# EAGLE board ultrasound (EAGLE 8.5.2)
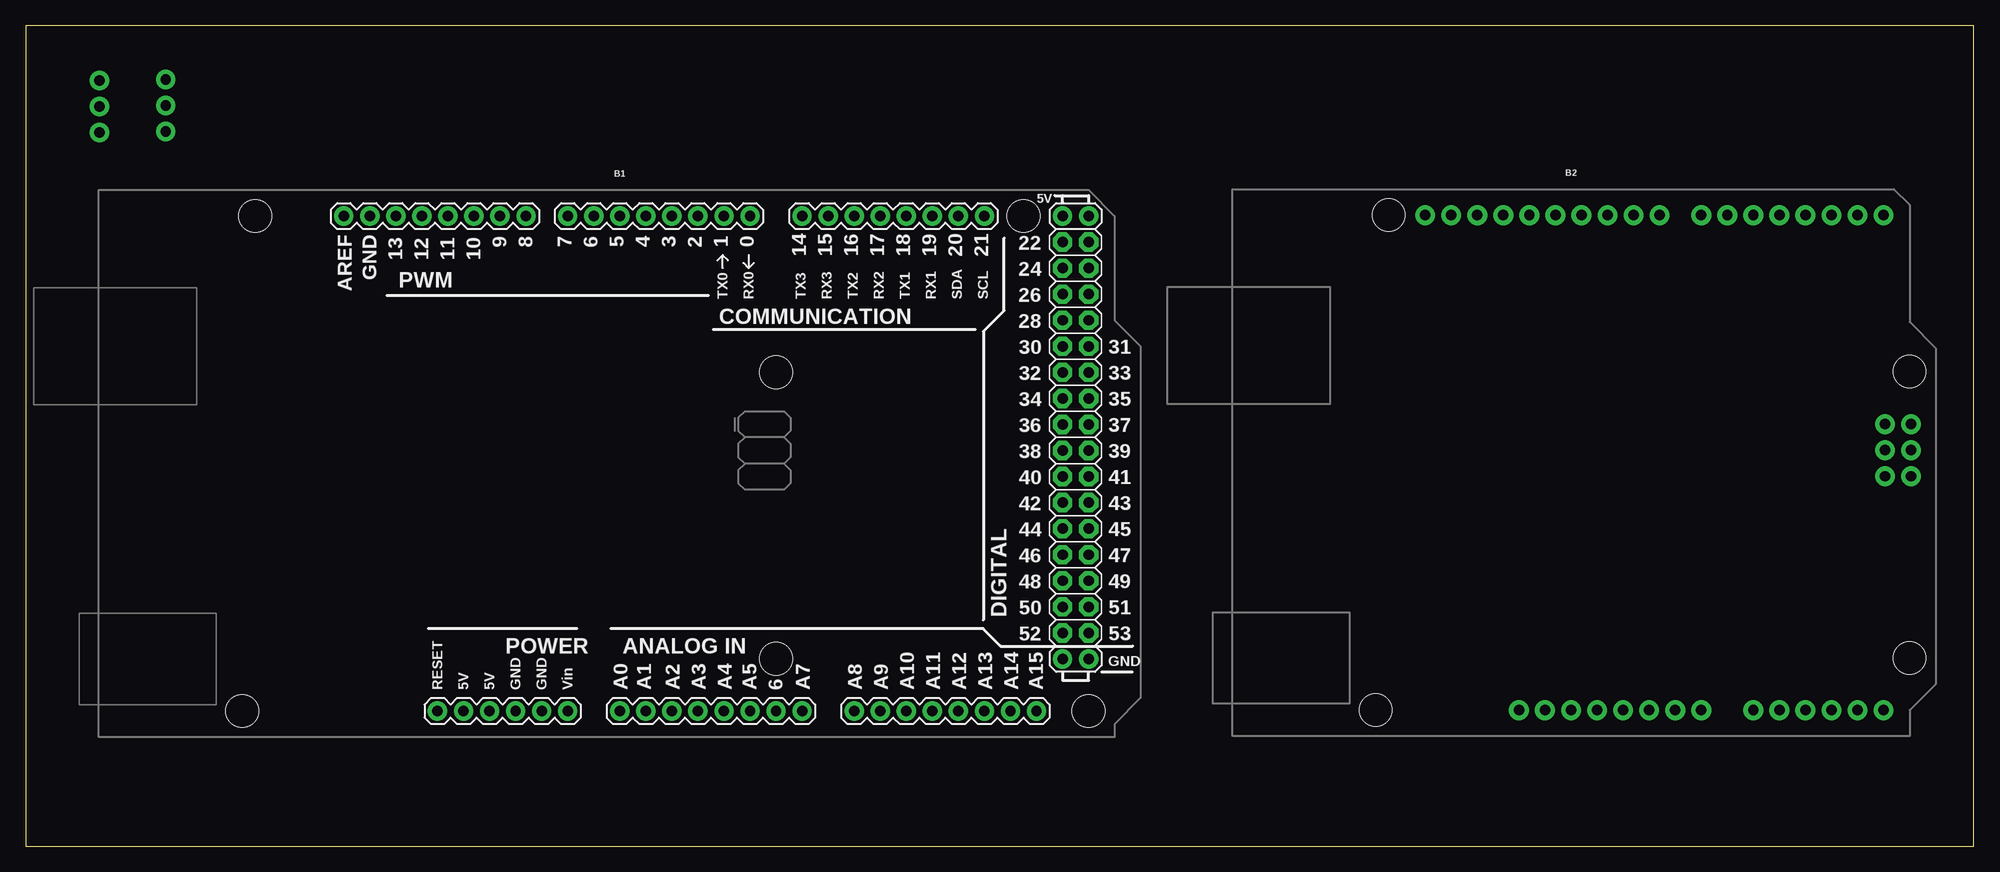
[diagram p0: board, top side]
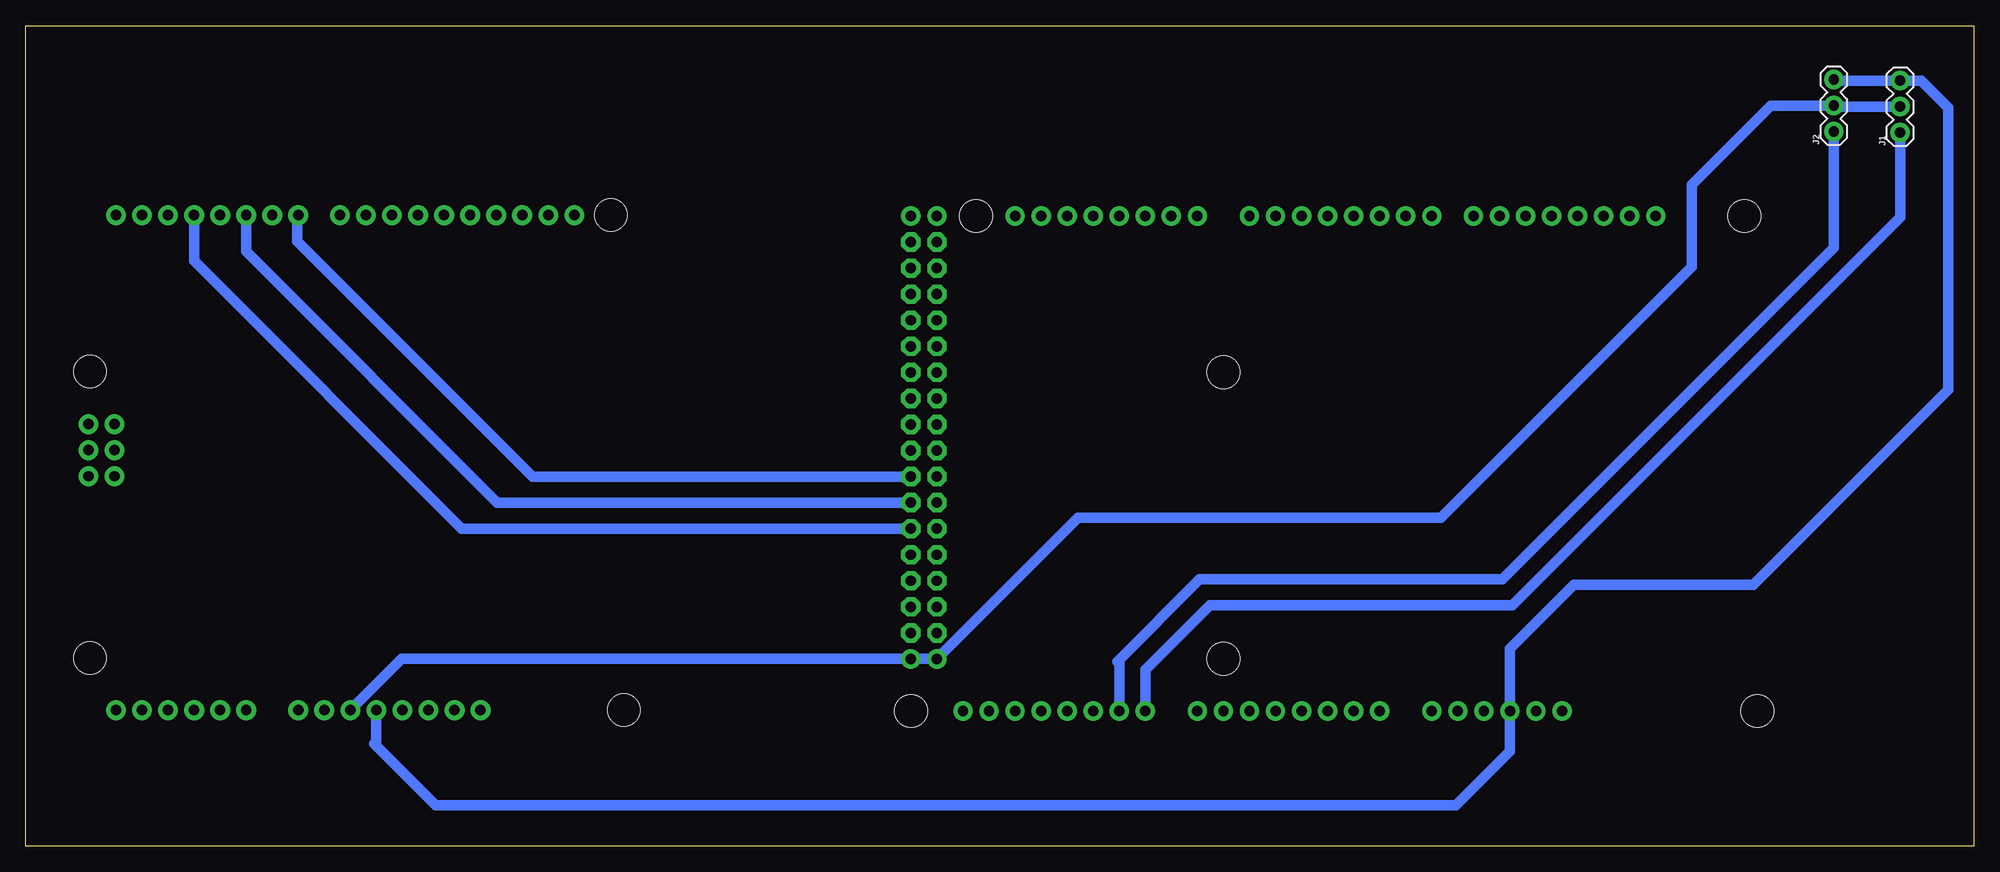
[diagram p1: board, bottom side, seen from below]

Size 190 x 80 mm. Coordinates in mm from the lower left corner, seen from the top.
Outline: 0,80 0,0 190,0 190,80 0,80
Copper layers (1*16): Top 0.035mm / dielectric 1.5mm / Bottom 0.035mm
Design rules "default": minimum track width 6mil, minimum drill 0.35mm, track to track 6mil, track to pad 6mil, pad to pad 6mil, via to via 6mil, smd to smd 6mil, copper to edge 40mil, drill to drill 6mil, minimum pad ring 10mil, minimum via ring 8mil, stop-mask expansion 4mil, vias tented up to drill 0mil, thermal gap 10mil

## Footprints (pad centres in the part's own frame; a part is rotated, then mirrored left to right if it is on the bottom)
ARDUINO_MEGA = drill 1.016 pad 1.88: 0 13.97,24.13; 1 11.43,24.13; 2 8.89,24.13; 3 6.35,24.13; 3.3V -13.97,-24.13; 4 3.81,24.13; 5 1.27,24.13; 5V@0 -11.43,-24.13; 5V@1 44.45,24.13; 5V@2 46.99,24.13; 6 -1.27,24.13; 7 -3.81,24.13; 8 -7.874,24.13; 9 -10.414,24.13; 10 -12.954,24.13; 11 -15.494,24.13; 12 -18.034,24.13; 13 -20.574,24.13; 14 19.05,24.13; 15 21.59,24.13; 16 24.13,24.13; 17 26.67,24.13; 18 29.21,24.13; 19 31.75,24.13; 20 34.29,24.13; 21 36.83,24.13; A0 1.27,-24.13; A1 3.81,-24.13; A2 6.35,-24.13; A3 8.89,-24.13; A4 11.43,-24.13; A5 13.97,-24.13; A6 16.51,-24.13; A7 19.05,-24.13; A8 24.13,-24.13; A9 26.67,-24.13; A10 29.21,-24.13; A11 31.75,-24.13; A12 34.29,-24.13; A13 36.83,-24.13; A14 39.37,-24.13; A15 41.91,-24.13; AREF -25.654,24.13; GND@0 -8.89,-24.13; GND@1 -6.35,-24.13; GND@2 44.45,-19.05; GND@3 46.99,-19.05; GND@4 -23.114,24.13; RESET -16.51,-24.13; VIN -3.81,-24.13 | drill 1.016 pad 1.88 octagon: 22 44.45,21.59; 23 46.99,21.59; 24 44.45,19.05; 25 46.99,19.05; 26 44.45,16.51; 27 46.99,16.51; 28 44.45,13.97; 29 46.99,13.97; 30 44.45,11.43; 31 46.99,11.43; 32 44.45,8.89; 33 46.99,8.89; 34 44.45,6.35; 35 46.99,6.35; 36 44.45,3.81; 37 46.99,3.81; 38 44.45,1.27; 39 46.99,1.27; 40 44.45,-1.27; 41 46.99,-1.27; 42 44.45,-3.81; 43 46.99,-3.81; 44 44.45,-6.35; 45 46.99,-6.35; 46 44.45,-8.89; 47 46.99,-8.89; 48 44.45,-11.43; 49 46.99,-11.43; 50 44.45,-13.97; 51 46.99,-13.97; 52 44.45,-16.51; 53 46.99,-16.51 | hole 3.2: -34.29,24.13; -35.56,-24.13; 16.51,8.89; 16.51,-19.05; 40.64,24.13; 46.99,-24.13
ARDUINO_R3 = drill 1.016 pad 1.93: 3.3V 2.54,-24.13; 5V 5.08,-24.13; A0 17.78,-24.13; A1 20.32,-24.13; A2 22.86,-24.13; A3 25.4,-24.13; A4 27.94,-24.13; A5 30.48,-24.13; AREF -9.144,24.13; D0 30.48,24.13; D1 27.94,24.13; D2 25.4,24.13; D3 22.86,24.13; D4 20.32,24.13; D5 17.78,24.13; D6 15.24,24.13; D7 12.7,24.13; D8 8.636,24.13; D9 6.096,24.13; D10 3.556,24.13; D11 1.016,24.13; D12 -1.524,24.13; D13 -4.064,24.13; GND@1 7.62,-24.13; GND@2 10.16,-24.13; GND@3 -6.604,24.13; GND@4 33.16,-1.32; IOREF -2.54,-24.13; MISO 30.62,3.76; MOSI 33.16,1.22; NC -5.08,-24.13; RESET@1 0,-24.13; RESET@2 30.62,-1.32; SCK 30.62,1.22; SCL -14.224,24.13; SDA -11.684,24.13; VCC 33.16,3.76; VIN 12.7,-24.13 | hole 3.175: -17.78,24.13; 33.02,8.89; 33.02,-19.05; -19.05,-24.13
1X03 = drill 1.016 pad 1.88: 1 0,0; 2 2.54,0; 3 5.08,0

## Placement (x,y rotation side)
B1  ARDUINO_MEGA_R3FULL  [ARDUINO_MEGA]  56.68,37.31 0 top
B2  ARDUINO_UNO_R3  [ARDUINO_R3]  150.72,37.39 0 top
J1  455-1750-1-ND  [1X03]  7.2,69.57 90 bottom
J2  455-1750-1-ND  [1X03]  13.66,69.67 90 bottom

## Library data of the parts
B1 B2 = SparkFun-Boards
J1 J2 = SparkFun-Connectors; PROD_ID: XXX-00000

## Nets
BLU: B1.41 B2.D7
GND: B1.GND@2 B1.GND@3 B2.GND@1 J1.2 J2.2
ROSSO: B1.45 B2.D3
SHARP1: B1.A8 J1.1
SHARP2: B1.A9 J2.1
VCC: B1.5V@0 B2.5V J1.3 J2.3
VERDE: B1.43 B2.D5

## Tracks (layer width: path | path; a pad name or v marks a point on that pad's centre or on a via)
BLU
  Bottom 1.016: B1.41 140.54,36.04 163.5,59 163.5,61.44 B2.D7
GND
  Bottom 1.016: B2.GND@1 153.34,18.26 B1.GND@3 B1.GND@2 87.38,32 52,32 27.5,56.5 27.5,64.5 19.79,72.21 J2.2 13.56,72.11 J1.2
N$1
  Bottom 0.001: 0,80 0,0 190,0 190,80 0,80
ROSSO
  Bottom 1.016: B1.45 147.46,30.96 173.57,57.08 B2.D3
SHARP1
  Bottom 1.016: B1.A8 80.81,17.19 74.5,23.5 45,23.5 7.2,61.3 J1.1
SHARP2
  Bottom 1.016: J2.1 13.66,58.34 46,26 75.5,26 83.5,18 83.35,17.85 B1.A9
VCC
  Bottom 1.016: B2.5V 155.79,10.21 156,10 150,4 50.5,4 45.25,9.25 B1.5V@0 45.25,19.25 39,25.5 21.5,25.5 2.5,44.5 2.5,72 5.15,74.65 J1.3 13.56,74.65 J2.3
VERDE
  Bottom 1.016: B2.D5 168.5,58 144,33.5 B1.43